# EAGLE board Servo (EAGLE 9.6.2)
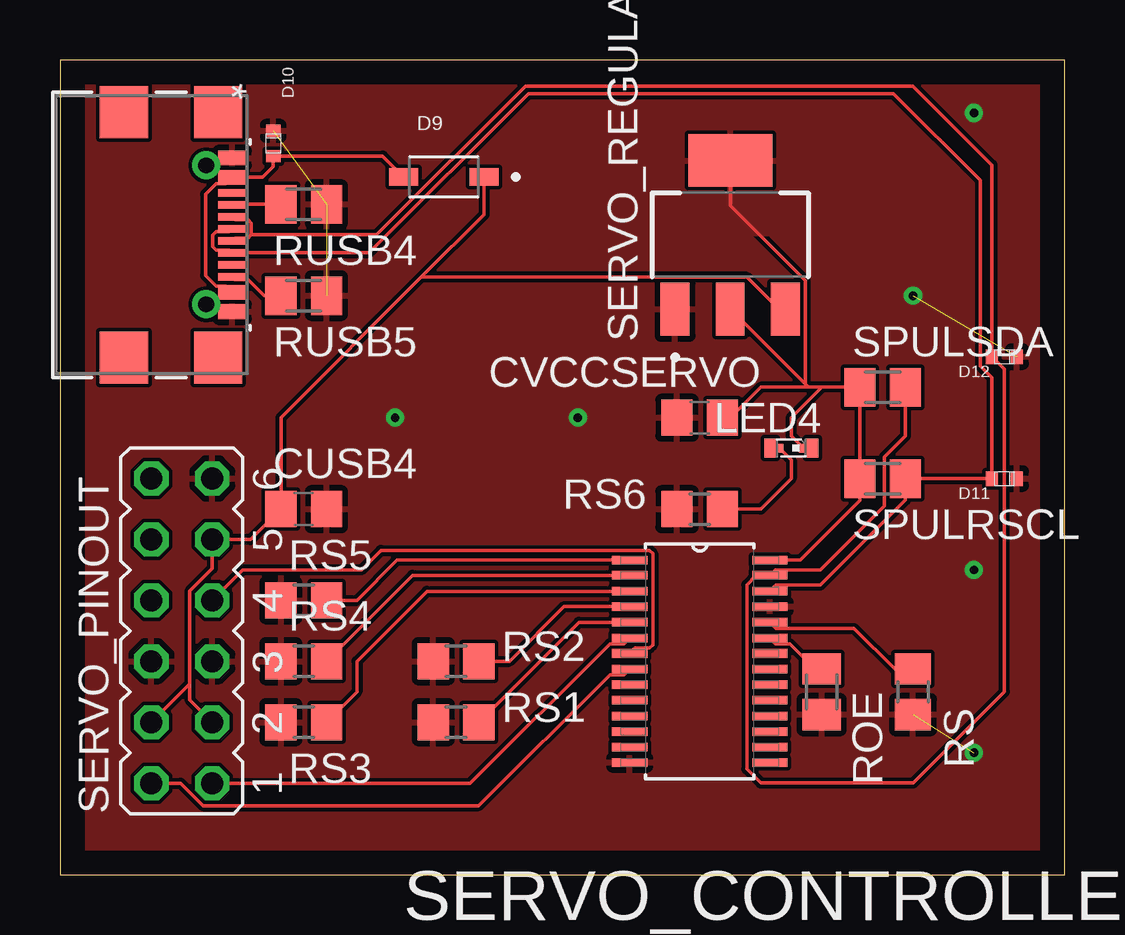
[diagram p0: board, top side]

Size 41.89 x 33.96 mm. Coordinates in mm from the lower left corner, seen from the top.
Outline: 0,0 41.89,0 41.89,33.96 0,33.96 0,0
Copper layers (1*16): Top 0.035mm / dielectric 1.5mm / Bottom 0.035mm
Design rules "default": minimum track width 6mil, minimum drill 0.35mm, track to track 6mil, track to pad 6mil, pad to pad 6mil, via to via 6mil, smd to smd 6mil, copper to edge 40mil, drill to drill 6mil, minimum pad ring 10mil, minimum via ring 8mil, stop-mask expansion 4mil, vias tented up to drill 0mil, thermal gap 10mil

## Footprints (pad centres in the part's own frame; a part is rotated, then mirrored left to right if it is on the bottom)
C0805 = smd 1.3 x 1.5: 1 -0.95,0; 2 0.95,0
SOD3715X145N = smd 1.21 x 0.73: A 1.68,0; C -1.68,0
MBTB-D-SOD-923F-IMP-0402 = smd 0.5 x 0.6: 1 -0.525,0; 2 0.525,0
USB4110-GF-A_GCT = drill 0.66 pad 0.66: 13 -2.896,2.286; 14 2.896,2.286 | smd 2.159 x 2.007: 15 -5.11,2.788; 16 5.11,2.788; 17 -5.11,-1.142; 18 5.11,-1.142 | smd 0.61 x 1.143: A1-B12 -3.2,3.363; A4-B9 -2.4,3.363; A9-B4 2.4,3.363; A12-B1 3.2,3.363 | smd 0.305 x 1.143: A5 -1.25,3.363; A6 -0.25,3.363; A7 0.25,3.363; A8 1.25,3.363; B5 1.75,3.363; B6 0.75,3.363; B7 -0.75,3.363; B8 -1.75,3.363
SMARTLED-TTW = smd 0.8 x 0.5: A 0,-0.875; C 0,0.875 | smd 0.35 x 0.35: A@1 0,-0.5; C@1 0,0.5
M0805 = smd 1.3 x 1.6: 1 -0.95,0; 2 0.95,0
R0805 = smd 1.3 x 1.5: 1 -0.95,0; 2 0.95,0
SOP65P640X110-28N = smd 1.473 x 0.356: 1 -2.921,4.216; 2 -2.921,3.581; 3 -2.921,2.921; 4 -2.921,2.286; 5 -2.921,1.626; 6 -2.921,0.965; 7 -2.921,0.33; 8 -2.921,-0.33; 9 -2.921,-0.965; 10 -2.921,-1.626; 11 -2.921,-2.286; 12 -2.921,-2.921; 13 -2.921,-3.581; 14 -2.921,-4.216; 15 2.921,-4.216; 16 2.921,-3.581; 17 2.921,-2.921; 18 2.921,-2.286; 19 2.921,-1.626; 20 2.921,-0.965; 21 2.921,-0.33; 22 2.921,0.33; 23 2.921,0.965; 24 2.921,1.626; 25 2.921,2.286; 26 2.921,2.921; 27 2.921,3.581; 28 2.921,4.216
JP6Q = drill 0.914 octagon: 1 -6.35,-1.27; 2 -6.35,1.27; 3 -3.81,-1.27; 4 -3.81,1.27; 5 -1.27,-1.27; 6 -1.27,1.27; 7 1.27,-1.27; 8 1.27,1.27; 9 3.81,-1.27; 10 3.81,1.27; 11 6.35,-1.27; 12 6.35,1.27
SOT230P700X185-4N = smd 2.2 x 1.2: 1 -3.1,2.3; 2 -3.1,0; 3 -3.1,-2.3 | smd 2.2 x 3.5: 4 3.1,0

## Placement (x,y rotation side)
CUSB4  10uF  [C0805]  10.16,15.24 0 top
CVCCSERVO  10uF  [C0805]  26.67,19.05 180 top
D9  1N5819HW-7-F  [SOD3715X145N]  16,29.08 180 top
D10  CPDQ5V0-HF  [MBTB-D-SOD-923F-IMP-0402]  8.89,30.48 270 top
D11  CPDQ5V0-HF  [MBTB-D-SOD-923F-IMP-0402]  39.37,16.51 180 top
D12  CPDQ5V0-HF  [MBTB-D-SOD-923F-IMP-0402]  39.37,21.59 180 top
I2C_USBC_OUT  USB4110-GF-A  [USB4110-GF-A_GCT]  3.81,26.67 270 top
LED4  [SMARTLED-TTW]  30.48,17.78 90 top
ROE  10k  [M0805]  31.75,7.62 270 top
RS  10k  [R0805]  35.56,7.62 90 top
RS1  10k  [R0805]  16.51,6.35 0 top
RS2  10k  [R0805]  16.51,8.89 0 top
RS3  10k  [R0805]  10.16,6.35 0 top
RS4  10k  [R0805]  10.16,8.89 0 top
RS5  10k  [R0805]  10.16,11.43 0 top
RS6  2.2k  [R0805]  26.67,15.24 0 top
RUSB4  5.1k  [M0805]  10.16,27.94 0 top
RUSB5  5.1k  [M0805]  10.16,24.13 0 top
SERVO_CONTROLLER  PCA9685PW,112  [SOP65P640X110-28N]  26.67,8.89 0 top
SERVO_PINOUT  [JP6Q]  5.08,10.16 90 top
SERVO_REGULATOR  AZ1117IH-3.3TRG1  [SOT230P700X185-4N]  27.94,26.67 90 top
SPULRSCL  10k  [M0805]  34.29,16.51 0 top
SPULSDA  10k  [M0805]  34.29,20.32 0 top

## Library data of the parts
CUSB4 CVCCSERVO = rcl; SPICEPREFIX: C
D9 = 1N5819HW-7-F; AVAILABILITY: In Stock; CHECK_PRICES: https://www.snapeda.com/parts/1N5819HW-7-F/Diodes+Inc./view-part/?ref=eda; DESCRIPTION: Diode Schottky 1A 40V SOD123 | Diodes Inc 1N5819HW-7-F; MF: Diodes Inc.; MP: 1N5819HW-7-F; PACKAGE: SOD-123 Fairchild Semiconductor; PRICE: None; PURCHASE-URL: https://www.snapeda.com/api/url_track_click_mouser/?unipart_id=42272&manufacturer=Diodes Inc.&part_name=1N5819HW-7-F&search_term=1n5819hw-7-f; SNAPEDA_LINK: https://www.snapeda.com/parts/1N5819HW-7-F/Diodes+Inc./view-part/?ref=snap
D10-D12 = CPDQ5V0-HF; AVAILABILITY: In Stock; CHECK_PRICES: https://www.snapeda.com/parts/CPDQ5V0-HF/Comchip+Technology/view-part/?ref=eda; DESCRIPTION: 18.6V Clamp 9.4A (8/20µs) Ipp Tvs Diode Surface Mount 0402/SOD-923F; MF: Comchip Technology; MP: CPDQ5V0-HF; PACKAGE: 0402 Comchip; PRICE: None; PURCHASE-URL: https://www.snapeda.com/api/url_track_click_mouser/?unipart_id=809934&manufacturer=Comchip Technology&part_name=CPDQ5V0-HF&search_term=cpdq5v0-hf; SNAPEDA_LINK: https://www.snapeda.com/parts/CPDQ5V0-HF/Comchip+Technology/view-part/?ref=snap
I2C_USBC_OUT = USB4110-GF-A; COPYRIGHT: Copyright (C) 2023 Ultra Librarian. All rights reserved.; MANUFACTURER_PART_NUMBER: USB4110-GF-A; MFR_NAME: Global Connector Technology
LED4 = adafruit
ROE RS RS1-RS6 RUSB4 RUSB5 SPULRSCL SPULSDA = rcl; SPICEPREFIX: R
SERVO_CONTROLLER = PCA9685PW_112; AVAILABILITY: In Stock; CHECK_PRICES: https://www.snapeda.com/parts/PCA9685PW,112/NXP+USA+Inc./view-part/?ref=eda; DESCRIPTION: LED Driver IC 16 Output Linear - PWM Dimming 25mA 28-TSSOP; MF: NXP USA; MP: PCA9685PW,112; PACKAGE: TSSOP-28 NXP Semiconductors; PRICE: None; PURCHASE-URL: https://pricing.snapeda.com/search?q=PCA9685PW,112&ref=eda; SNAPEDA_LINK: https://www.snapeda.com/parts/PCA9685PW,112/NXP+USA+Inc./view-part/?ref=snap
SERVO_PINOUT = jumper
SERVO_REGULATOR = AZ1117IH-3.3TRG1; AVAILABILITY: In Stock; CHECK_PRICES: https://www.snapeda.com/parts/AZ1117IH-3.3TRG1/Diodes+Inc./view-part/?ref=eda; DESCRIPTION: Linear Voltage Regulator IC Positive Fixed 1 Output 1A SOT-223-3; MF: Diodes Inc.; MP: AZ1117IH-3.3TRG1; PACKAGE: SOT-223 Diodes Inc.; PRICE: None; PURCHASE-URL: https://www.snapeda.com/api/url_track_click_mouser/?unipart_id=490259&manufacturer=Diodes Inc.&part_name=AZ1117IH-3.3TRG1&search_term=az1117ih-3.3trg1; SNAPEDA_LINK: https://www.snapeda.com/parts/AZ1117IH-3.3TRG1/Diodes+Inc./view-part/?ref=snap

## Nets
3.3VOUTUSB1: CVCCSERVO.1 LED4.A@1 SERVO_CONTROLLER.28 SERVO_REGULATOR.2 SERVO_REGULATOR.4 SPULRSCL.1 SPULSDA.1
5VOUTUSB12: CUSB4.1 D9.C SERVO_PINOUT.3 SERVO_PINOUT.4 SERVO_PINOUT.9 SERVO_REGULATOR.3
A0: RS5.2 SERVO_CONTROLLER.1
A1: RS4.2 SERVO_CONTROLLER.2
A2: RS3.2 SERVO_CONTROLLER.3
A3: RS2.2 SERVO_CONTROLLER.4
A4: RS1.2 SERVO_CONTROLLER.5
A5: RS.2 SERVO_CONTROLLER.24
CC1_RUSB4: I2C_USBC_OUT.A5 RUSB4.1
CC2: I2C_USBC_OUT.B5 RUSB5.1
GND: CUSB4.2 CVCCSERVO.2 D10.1 D11.1 D12.1 I2C_USBC_OUT.A1-B12 I2C_USBC_OUT.A12-B1 ROE.2 RS1.1 RS2.1 RS3.1 RS4.1 RS5.1 RS6.1 RS.1 RUSB4.2 RUSB5.2 SERVO_CONTROLLER.14 SERVO_CONTROLLER.25 SERVO_PINOUT.5 SERVO_PINOUT.6 SERVO_PINOUT.11 SERVO_REGULATOR.1
LED_RS6: LED4.C@1 RS6.2
OE: ROE.1 SERVO_CONTROLLER.23
PWM1: SERVO_CONTROLLER.6 SERVO_PINOUT.1
PWM2: SERVO_CONTROLLER.7 SERVO_PINOUT.7
PWM3: SERVO_CONTROLLER.8 SERVO_PINOUT.2
SRVSCLM: D11.2 I2C_USBC_OUT.A6 I2C_USBC_OUT.B6 SERVO_CONTROLLER.26 SPULRSCL.2
SRVSDAM: D12.2 I2C_USBC_OUT.A7 I2C_USBC_OUT.B7 SERVO_CONTROLLER.27 SPULSDA.2
VBUS12: D9.A D10.2 I2C_USBC_OUT.A4-B9 I2C_USBC_OUT.A9-B4

## Tracks (layer width: path | path; a pad name or v marks a point on that pad's centre or on a via)
3.3VOUTUSB1
  Top 0.152: SERVO_CONTROLLER.28 30.86,13.11 33.34,15.59 SPULRSCL.1 SPULSDA.1 | LED4.A@1 30.48,18.28 30.48,19.05 31.75,20.32 | CVCCSERVO.1 27.94,19.05 29.21,20.32 31.75,20.32 | SERVO_REGULATOR.2 31.07,20.44 | SERVO_REGULATOR.4 27.94,27.89 31.07,24.77 31.07,20.44 | SPULSDA.1 31.75,20.32 | SPULSDA.1 31.19,20.32 31.07,20.44
  pour Top: 21.59,27.94 21.59,30.48 22.86,31.75 34.29,31.75 35.56,30.48 35.56,27.94 34.29,26.67 22.86,26.67
5VOUTUSB12
  Top 0.152: SERVO_REGULATOR.3 29.96,23.57 28.64,24.9 15.06,24.9 | 15.06,24.9 17.68,27.52 D9.C | 15.06,24.9 9.21,19.05 CUSB4.1 7.94,13.97 SERVO_PINOUT.9 6.35,12.76 5.41,11.82 5.41,7.95 | 5.41,7.95 SERVO_PINOUT.4 | 5.41,7.95 5.41,7.29 SERVO_PINOUT.3
A0
  Top 0.152: RS5.2 12.38,11.43 14.06,13.11 SERVO_CONTROLLER.1
A1
  Top 0.152: RS4.2 14.69,12.47 SERVO_CONTROLLER.2
A2
  Top 0.152: RS3.2 12.38,7.62 12.38,8.89 15.3,11.81 SERVO_CONTROLLER.3
A3
  Top 0.152: RS2.2 18.73,8.89 21.02,11.18 SERVO_CONTROLLER.4
A4
  Top 0.152: RS1.2 21.63,10.52 SERVO_CONTROLLER.5
A5
  Top 0.152: SERVO_CONTROLLER.24 29.84,10.26 33.1,10.26 34.79,8.57 RS.2
CC1_RUSB4
  Top 0.152: RUSB4.1 7.19,27.94 I2C_USBC_OUT.A5
CC2
  Top 0.152: RUSB5.1 8.51,24.13 7.84,24.8 7.29,24.8 I2C_USBC_OUT.B5
GND  (via drill 0.35)  (4 unrouted)
  other vias: 38.1,5.08 21.59,19.05 13.97,19.05 35.56,24.13 38.1,31.75 38.1,12.7
  pour Top: -1.27,35.56 43.18,35.56 43.18,-1.27 -1.27,-1.27
LED_RS6
  Top 0.152: LED4.C@1 30.48,17.28 30.48,16.51 29.21,15.24 RS6.2
OE
  Top 0.152: SERVO_CONTROLLER.23 29.82,9.63 30.42,9.63 31.48,8.57 ROE.1
PWM1
  Top 0.152: SERVO_CONTROLLER.6 23.52,9.63 22.92,9.63 17.1,3.81 SERVO_PINOUT.1
PWM2
  Top 0.152: SERVO_PINOUT.7 7.62,12.7 12.57,12.7 13.38,13.51 24.58,13.51 24.71,13.38 24.71,9.58 24.58,9.45 23.98,9.45 SERVO_CONTROLLER.7
PWM3
  Top 0.152: SERVO_CONTROLLER.8 23.52,8.33 22.92,8.33 17.46,2.87 5.96,2.87 5.02,3.81 SERVO_PINOUT.2
SRVSCLM
  Top 0.152: SERVO_CONTROLLER.26 29.84,12.06 31.69,12.06 35.24,15.61 SPULRSCL.2 D11.2 38.84,20.72 38.37,21.2 38.37,28.94 34.75,32.56 19.53,32.56 12.88,25.92 I2C_USBC_OUT.B6 7.05,26.04 6.51,26.04 6.37,26.17 6.37,26.67 6.51,26.8 7.05,26.8 I2C_USBC_OUT.A6
SRVSDAM
  Top 0.152: 7.97,26.67 7.97,27.17 7.84,27.3 7.29,27.3 I2C_USBC_OUT.B7 | 7.97,26.67 7.84,26.54 7.29,26.54 I2C_USBC_OUT.A7 | 7.97,26.67 13.21,26.67 19.4,32.87 35.56,32.87 38.84,29.58 D12.2 39.37,21.07 39.37,7.62 35.57,3.82 29.21,3.82 28.63,4.4 28.63,12.08 29.01,12.47 SERVO_CONTROLLER.27 29.82,12.7 31.69,12.7 34.36,15.37 34.36,17.41 35.24,18.28 SPULSDA.2
VBUS12
  Top 0.152: I2C_USBC_OUT.A9-B4 6.9,24.54 6.51,24.54 6.07,24.98 6.07,28.36 6.51,28.8 6.9,28.8 I2C_USBC_OUT.A4-B9 8.44,29.07 8.89,29.52 D10.2 13.45,29.95 D9.A